# EAGLE board Display PCB v48 (EAGLE 9.7.0)
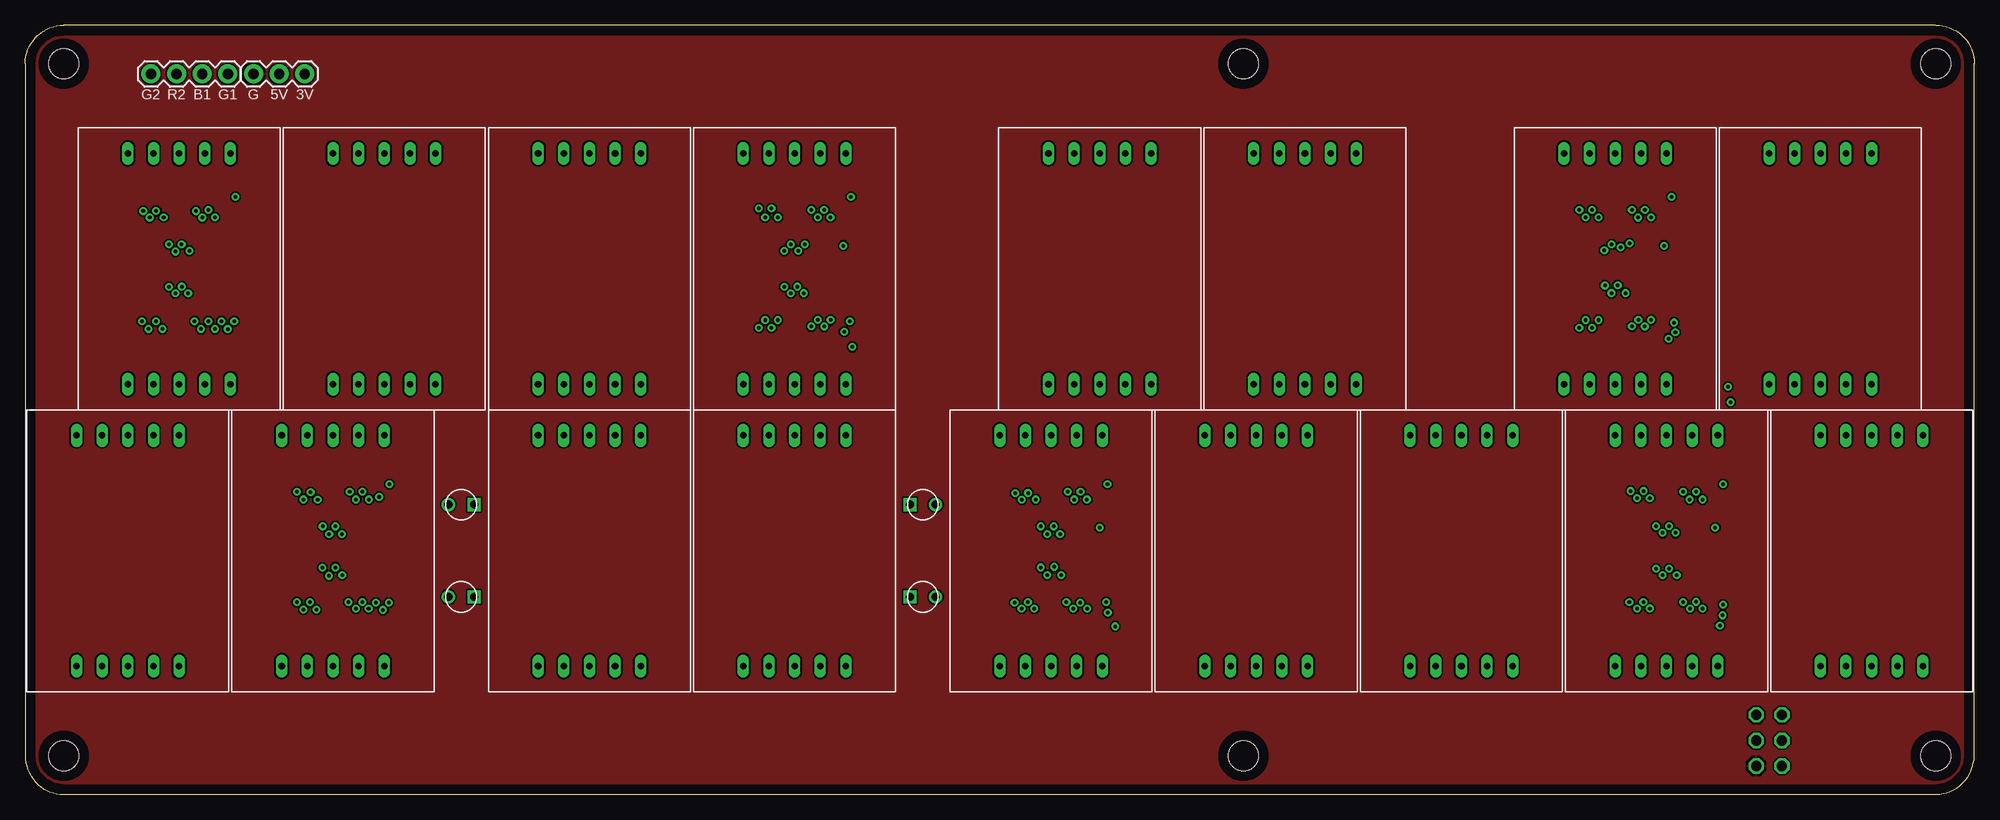
[diagram p0: board, top side]
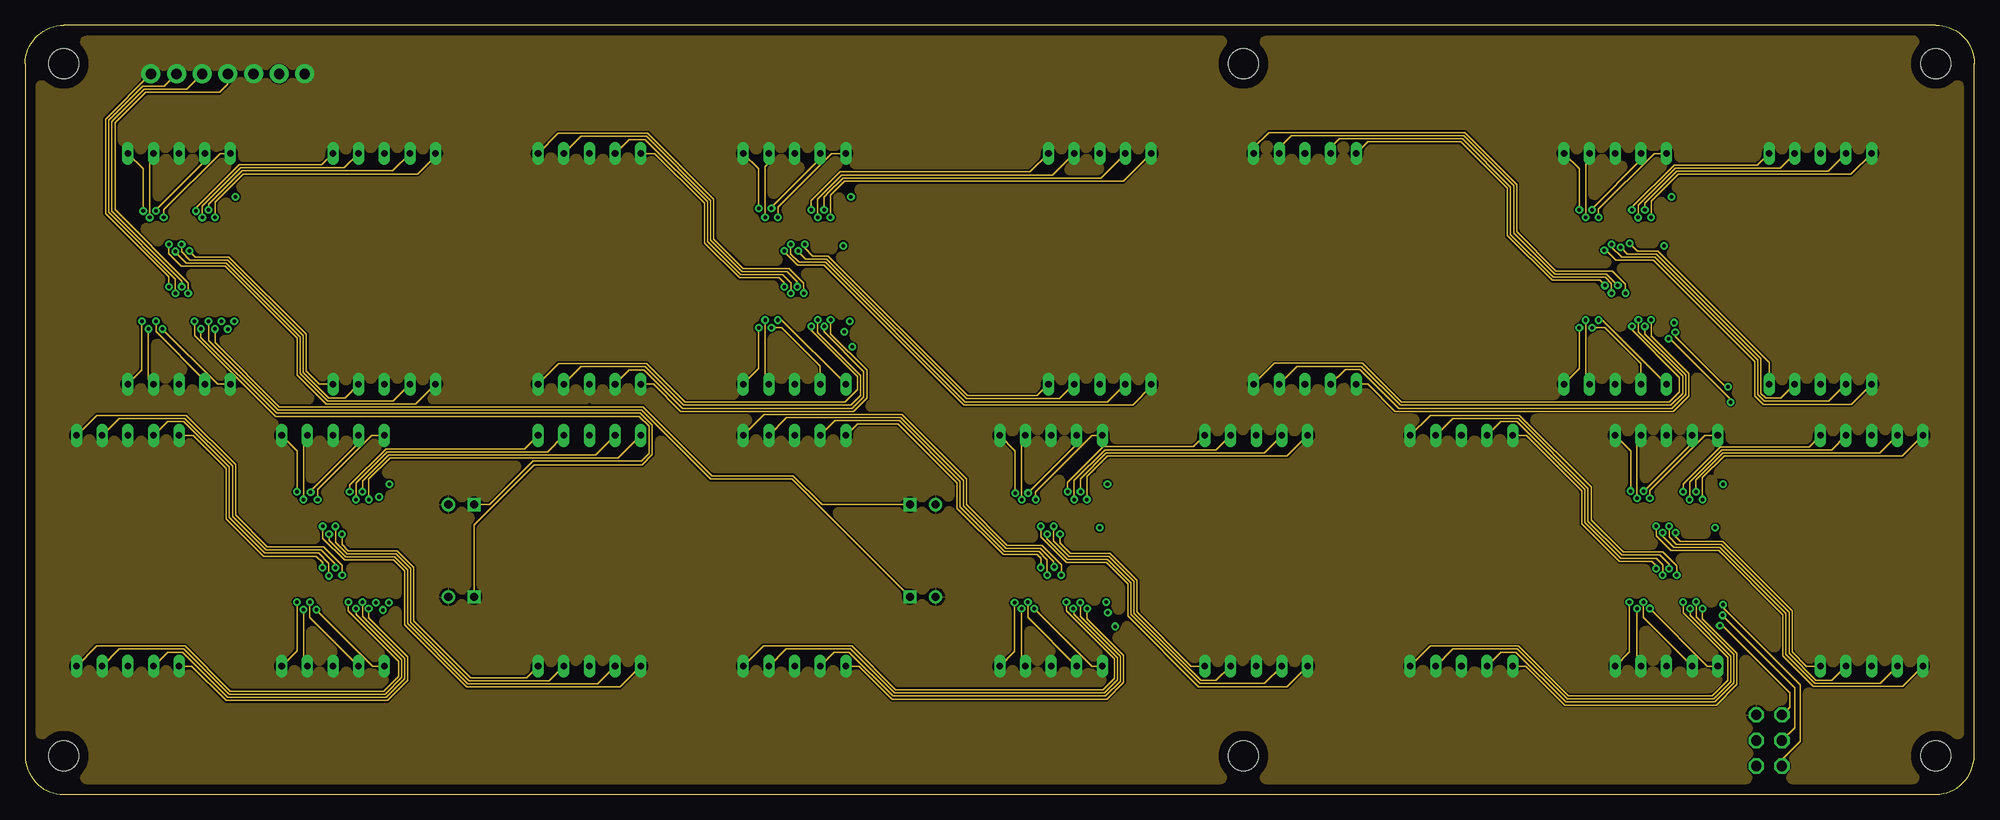
[diagram p1: board, inner layer Route2]
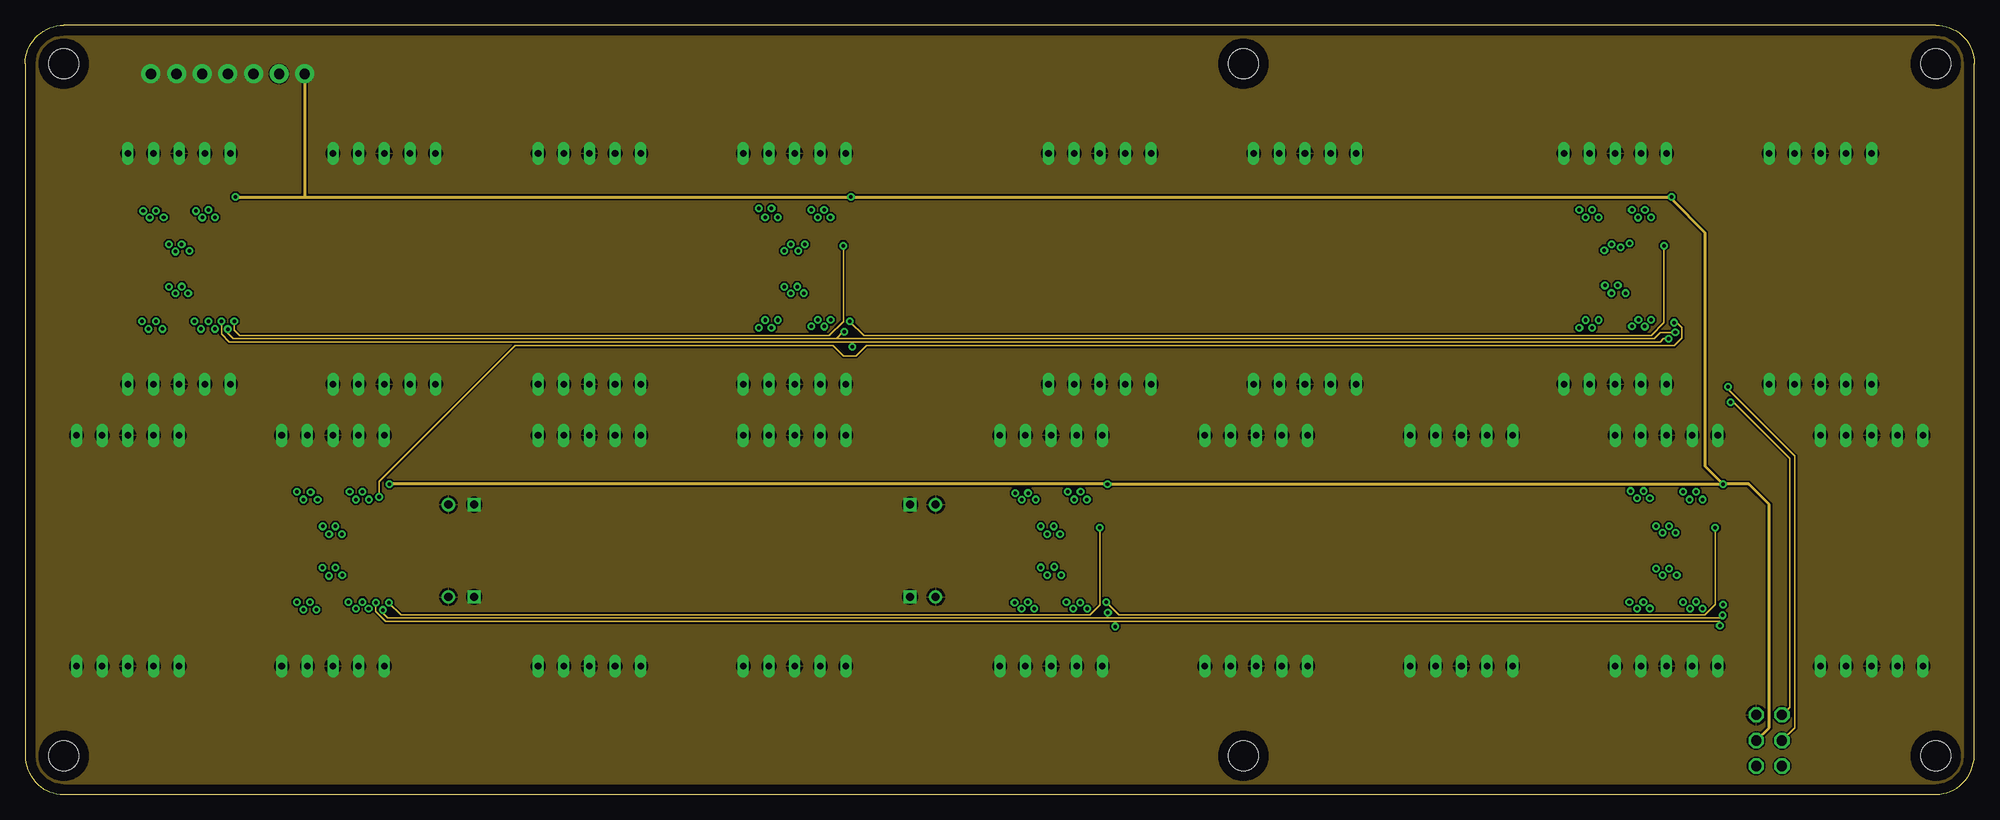
[diagram p2: board, inner layer Route15]
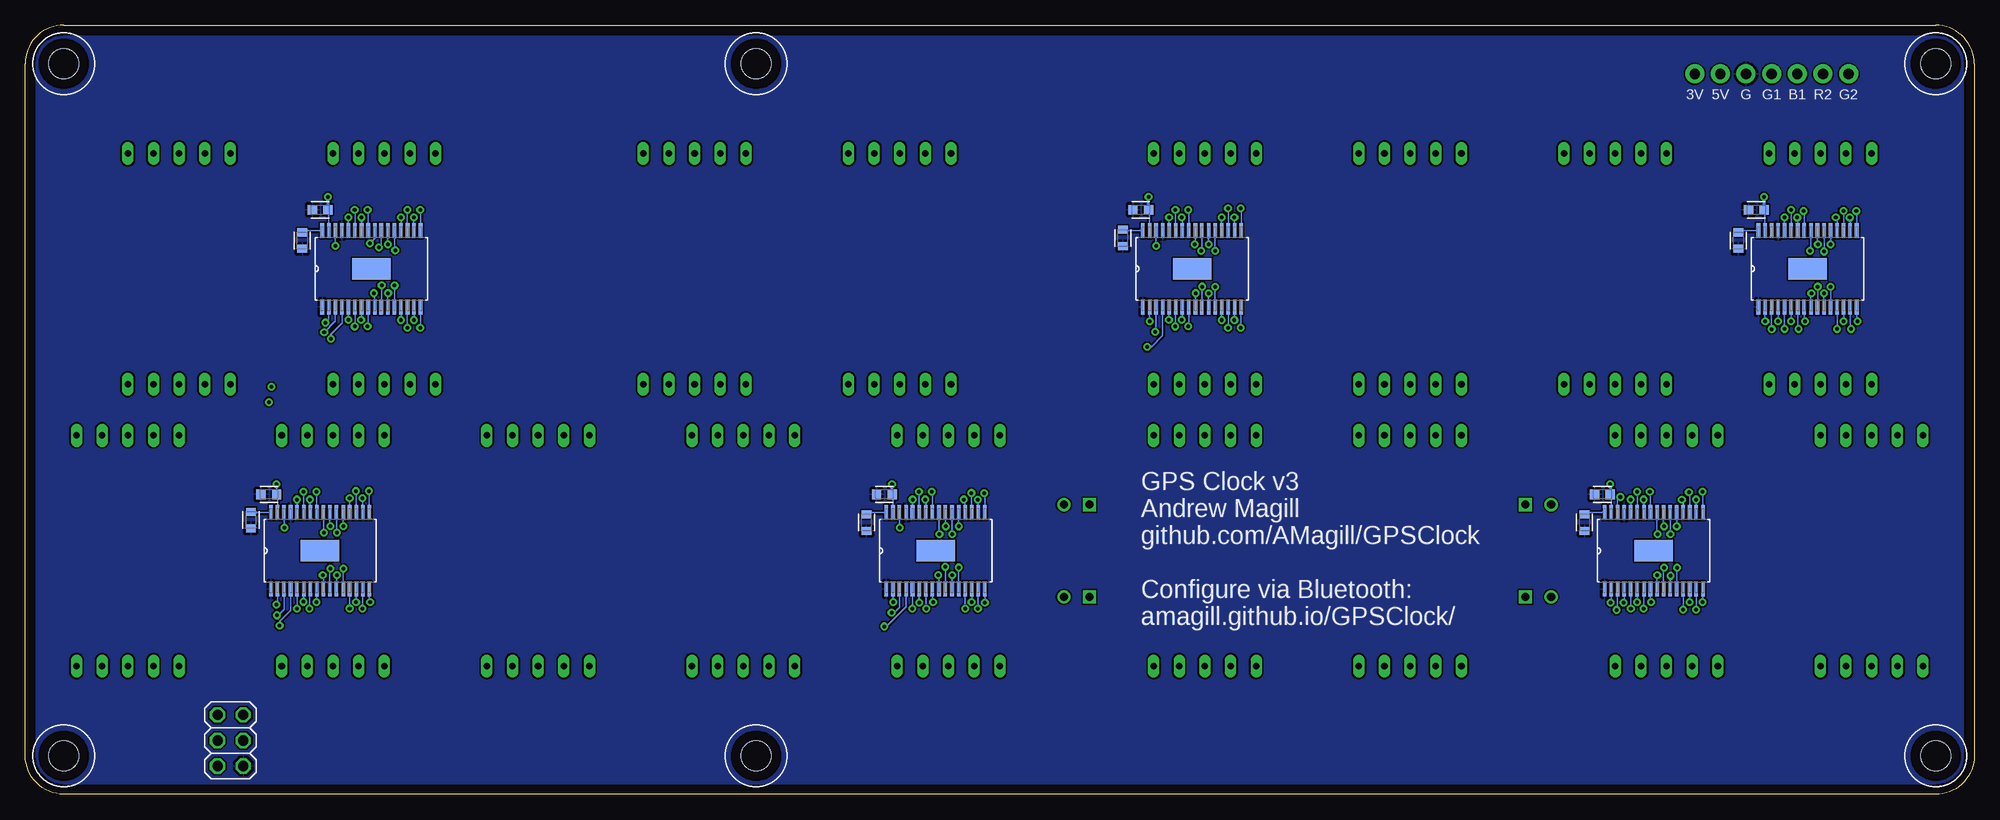
[diagram p3: board, bottom side, seen from below]

Size 193.04 x 76.2 mm. Coordinates in mm from the lower left corner, seen from the top.
Outline: 3.81,0 189.23,0 arc88 193.04,3.81 193.04,72.39 arc91 189.23,76.2 3.81,76.2 arc90 0,72.39 0,3.81 arc90 3.81,0
Copper layers (1+2*15+16): Top / Route2 / Route15 / Bottom
Stack-up 4 Layer Stack: Top SilkScreen Epoxy Ink / Top SolderMask SR:Green 0.0254mm Dk 4.3 / Top Surface Finish Lead-Free 0.02mm / Top CuFoil:007 0.035mm / Dielectric-1 Prepreg:001 0.064mm / Dielectric-2 Prepreg:001 0.064mm / Route2 CuFoil:007 0.035mm / Dielectric-3 User Defined 1.113mm / Route15 CuFoil:007 0.035mm / Dielectric-4 Prepreg:001 0.064mm / Dielectric-5 Prepreg:001 0.064mm / Bottom CuFoil:007 0.035mm / Bottom Surface Finish Lead-Free 0.02mm / Bottom SolderMask SR:Green 0.0254mm Dk 4.3 / Bottom SilkScreen Epoxy Ink
Design rules: minimum copper width 6mil, minimum drill size 0.35mm, copper clearance wire_polygon to wire_polygon 6mil, copper clearance wire_polygon to pad_smd 6mil, copper clearance wire_polygon to via 6mil, copper clearance pad_smd to pad_smd 6mil, copper clearance pad_smd to via 6mil, copper clearance via to via 6mil, copper clearance smd to pad (same net) 6mil, copper clearance smd to via (same net) 6mil, copper clearance smd to smd (same net) 6mil, dimension clearance 40mil, via restrict clearance 0mil, restrict clearance 0mil, drill distance 6mil, keepout clearance 0mil
Holes 2.95 mm at 3.81,72.39 3.81,3.81 189.23,72.39 189.23,3.81 120.65,72.39 120.65,3.81

## Footprints (pad centres in the part's own frame; a part is rotated, then mirrored left to right if it is on the bottom)
CAPC1608X85 = smd 0.921 x 0.97: 1 -0.775,0; 2 0.775,0
1X04 = drill 1.016 pad 1.88: 1 0,0; 2 2.54,0; 3 5.08,0; 4 7.62,0
1X03 = drill 1.016 pad 1.88: 1 0,0; 2 2.54,0; 3 5.08,0
2X03 = drill 1.016 octagon: 1 -2.54,-1.27; 2 -2.54,1.27; 3 0,-1.27; 4 0,1.27; 5 2.54,-1.27; 6 2.54,1.27
RESC1608X60 = smd 0.799 x 0.974: 1 -0.815,0; 2 0.815,0
SOP65P810X120-33N = smd 1.473 x 0.356: 1 -3.785,4.877; 2 -3.785,4.216; 3 -3.785,3.581; 4 -3.785,2.921; 5 -3.785,2.286; 6 -3.785,1.626; 7 -3.785,0.965; 8 -3.785,0.33; 9 -3.785,-0.33; 10 -3.785,-0.965; 11 -3.785,-1.626; 12 -3.785,-2.286; 13 -3.785,-2.921; 14 -3.785,-3.581; 15 -3.785,-4.216; 16 -3.785,-4.877; 17 3.785,-4.877; 18 3.785,-4.216; 19 3.785,-3.581; 20 3.785,-2.921; 21 3.785,-2.286; 22 3.785,-1.626; 23 3.785,-0.965; 24 3.785,-0.33; 25 3.785,0.33; 26 3.785,0.965; 27 3.785,1.626; 28 3.785,2.286; 29 3.785,2.921; 30 3.785,3.581; 31 3.785,4.216; 32 3.785,4.877 | smd 2.108 x 3.81: 33 0,0
WP424IDT = drill 0.8: AN 0,-1.27 | drill 0.8 square: CAT 0,1.27
KW1-801AVB-FOOTPRINT = drill 0.65 long: 1 -5.08,-11.43; 2 -2.54,-11.43; 3 0,-11.43; 4 2.54,-11.43; 5 5.08,-11.43; 6 5.08,11.43; 7 2.54,11.43; 8 0,11.43; 9 -2.54,11.43; 10 -5.08,11.43

## Placement (x,y rotation side)
C1  10n  [CAPC1608X85]  21.59,57.91 180 bottom
C2  10n  [CAPC1608X85]  82.55,57.91 180 bottom
C3  10n  [CAPC1608X85]  163.83,57.91 180 bottom
C4  10n  [CAPC1608X85]  36.83,29.72 180 bottom
C5  10n  [CAPC1608X85]  107.95,29.72 180 bottom
C6  10n  [CAPC1608X85]  168.91,29.72 180 bottom
J1  [1X04]  20.07,71.37 180 top
J3  455-1750-1-ND  [1X03]  22.61,71.37 0 top
JP1  PINHD-2X3  [2X03]  172.72,5.33 270 bottom
R1  2.7K  [RESC1608X60]  23.37,54.86 90 bottom
R2  2.7K  [RESC1608X60]  84.33,55.12 90 bottom
R3  2.7K  [RESC1608X60]  165.61,54.86 90 bottom
R4  2.7K  [RESC1608X60]  38.61,26.92 90 bottom
R5  2.7K  [RESC1608X60]  109.73,26.92 90 bottom
R6  2.7K  [RESC1608X60]  170.69,27.18 90 bottom
U1  TLC5952DAP  [SOP65P810X120-33N]  16.51,52.07 90 bottom
U2  TLC5952DAP  [SOP65P810X120-33N]  77.47,52.07 90 bottom
U3  TLC5952DAP  [SOP65P810X120-33N]  158.75,52.07 90 bottom
U4  TLC5952DAP  [SOP65P810X120-33N]  31.75,24.13 90 bottom
U5  TLC5952DAP  [SOP65P810X120-33N]  102.87,24.13 90 bottom
U6  TLC5952DAP  [SOP65P810X120-33N]  163.83,24.13 90 bottom
U$1  WP424IDT  [WP424IDT]  88.9,28.7 90 top
U$2  KW1-801AVB  [KW1-801AVB-FOOTPRINT]  15.24,52.07 0 top
U$3  KW1-801AVB  [KW1-801AVB-FOOTPRINT]  35.56,52.07 0 top
U$4  KW1-801AVB  [KW1-801AVB-FOOTPRINT]  55.88,52.07 0 top
U$5  KW1-801AVB  [KW1-801AVB-FOOTPRINT]  76.2,52.07 0 top
U$6  KW1-801AVB  [KW1-801AVB-FOOTPRINT]  106.43,52.07 0 top
U$7  KW1-801AVB  [KW1-801AVB-FOOTPRINT]  126.75,52.07 0 top
U$8  KW1-801AVB  [KW1-801AVB-FOOTPRINT]  157.48,52.07 0 top
U$9  KW1-801AVB  [KW1-801AVB-FOOTPRINT]  177.8,52.07 0 top
U$10  KW1-801AVB  [KW1-801AVB-FOOTPRINT]  10.16,24.13 0 top
U$11  KW1-801AVB  [KW1-801AVB-FOOTPRINT]  30.48,24.13 0 top
U$12  KW1-801AVB  [KW1-801AVB-FOOTPRINT]  55.88,24.13 0 top
U$13  KW1-801AVB  [KW1-801AVB-FOOTPRINT]  76.2,24.13 0 top
U$14  KW1-801AVB  [KW1-801AVB-FOOTPRINT]  101.6,24.13 0 top
U$15  KW1-801AVB  [KW1-801AVB-FOOTPRINT]  121.92,24.13 0 top
U$16  KW1-801AVB  [KW1-801AVB-FOOTPRINT]  142.24,24.13 0 top
U$17  KW1-801AVB  [KW1-801AVB-FOOTPRINT]  162.56,24.13 0 top
U$18  KW1-801AVB  [KW1-801AVB-FOOTPRINT]  182.88,24.13 0 top
U$19  WP424IDT  [WP424IDT]  88.9,19.56 90 top
U$20  WP424IDT  [WP424IDT]  43.18,19.56 270 top
U$21  WP424IDT  [WP424IDT]  43.18,28.7 270 top

## Library data of the parts
C1-C6 = Capacitor; CATEGORY: Capacitor; PACKAGE_SIZE: 0603; PACKAGE_TYPE: SMD; SUBCATEGORY: Ceramic Capacitors; TYPE: MLCC
J1 = SparkFun-Connectors; PROD_ID: CONN-09696
J3 = SparkFun-Connectors; PROD_ID: XXX-00000
JP1 = Connector; CATEGORY: Headers; DESCRIPTION: Header-Straight-2x3 Position; PACKAGE_TYPE: THT; PITCH: 0.100" (2.54mm); SUBCATEGORY: Headers-Male Pins; TYPE: Board to Board or Cable-Unshrouded-Through Hole-Straight
R1-R6 = Resistor; CATEGORY: Resistors; DESCRIPTION: Chip Resistor 1.60 X 0.82 X 0.60 mm body 0603(1608-METRIC) Package; PACKAGE_SIZE: 0603; PACKAGE_TYPE: SMD
U1-U6 = SnapEDA Library; MPN: TLC5952DAP; OC_FARNELL: 1755260; OC_NEWARK: 24R9993; PACKAGE: HTSSOP-32; SUPPLIER: Texas Instruments
U$1-U$21 = GPS Clock Components

## Nets
3VCC: C1.1 C2.1 C3.1 C4.1 C5.1 C6.1 J3.3 JP1.4 U1.31 U2.31 U3.31 U4.31 U5.31 U6.31
5VCC: J3.2 JP1.2 U$1.AN U$2.3 U$2.8 U$3.3 U$3.8 U$4.3 U$4.8 U$5.3 U$5.8 U$6.3 U$6.8 U$7.3 U$7.8 U$8.3 U$8.8 U$9.3 U$9.8 U$10.3 U$10.8 U$11.3 U$11.8 U$12.3 U$12.8 U$13.3 U$13.8 U$14.3 U$14.8 U$15.3 U$15.8 U$16.3 U$16.8 U$17.3 U$17.8 U$18.3 U$18.8 U$19.AN U$20.AN U$21.AN
B1 [segments]: J1.2 U1.10
CLK: JP1.3 U1.3 U2.3 U3.3 U4.3 U5.3 U6.3
G1 [segments]: J1.1 U1.9
G2 [segments]: J1.4 U1.12
GND: C1.2 C2.2 C3.2 C4.2 C5.2 C6.2 J3.1 JP1.6 R1.1 R2.1 R3.1 R4.1 R5.1 R6.1 U1.1 U1.29 U2.1 U2.29 U3.1 U3.29 U4.1 U4.29 U5.1 U5.29 U6.1 U6.29
LATCH: JP1.1 U1.4 U2.4 U3.4 U4.4 U5.4 U6.4
N$1 [segments]: U2.10 U$4.9
N$2 [segments]: U2.11 U$4.7
N$3 [segments]: U2.12 U$4.6
N$4 [segments]: U2.13 U$5.5
N$5 [segments]: U2.14 U$5.4
N$6: R1.2 U1.32
N$7 [segments]: U1.20 U$2.6
N$8 [segments]: U1.19 U$2.7
N$9 [segments]: U1.18 U$2.9
N$10 [segments]: U1.17 U$2.10
N$11 [segments]: U1.16 U$2.1
N$12 [segments]: U1.15 U$2.2
N$13 [segments]: U1.14 U$2.4
N$14 [segments]: U1.13 U$2.5
N$15 [segments]: U4.13 U$11.5
N$16 [segments]: U2.15 U$5.2
N$17 [segments]: U1.21 U$3.5
N$18 [segments]: U1.22 U$3.4
N$19 [segments]: U1.23 U$3.2
N$20 [segments]: U1.24 U$3.1
N$21 [segments]: U1.25 U$3.10
N$22 [segments]: U1.26 U$3.9
N$23 [segments]: U1.27 U$3.7
N$24 [segments]: U1.28 U$3.6
N$25 [segments]: U2.16 U$5.1
N$26 [segments]: U2.17 U$5.10
N$27 [segments]: U2.18 U$5.9
N$28 [segments]: U2.19 U$5.7
N$29 [segments]: U2.20 U$5.6
N$30 [segments]: U4.10 U$10.9
N$31 [segments]: U2.21 U$6.5
N$32 [segments]: U2.22 U$6.4
N$33 [segments]: U2.23 U$6.2
N$34 [segments]: U2.24 U$6.1
N$35 [segments]: U2.25 U$6.10
N$36 [segments]: U2.26 U$6.9
N$37 [segments]: U2.27 U$6.7
N$38 [segments]: U2.28 U$6.6
N$39 [segments]: U2.5 U$4.5
N$40 [segments]: U2.6 U$4.4
N$41 [segments]: U2.7 U$4.2
N$42 [segments]: U2.8 U$4.1
N$43 [segments]: U2.9 U$4.10
N$44 [segments]: U3.10 U$7.9
N$45 [segments]: U3.11 U$7.7
N$46 [segments]: U3.12 U$7.6
N$47 [segments]: U4.11 U$10.7
N$48 [segments]: U4.12 U$10.6
N$49 [segments]: U4.21 U$12.5
N$50 [segments]: U4.22 U$12.4
N$51 [segments]: U4.23 U$12.2
N$52 [segments]: U4.24 U$12.1
N$53 [segments]: U4.25 U$12.10
N$54 [segments]: U4.26 U$12.9
N$55 [segments]: U3.21 U$9.5
N$56 [segments]: U3.22 U$9.4
N$57 [segments]: U3.23 U$9.2
N$58 [segments]: U3.24 U$9.1
N$59 [segments]: U3.25 U$9.10
N$60 [segments]: U3.26 U$9.9
N$61 [segments]: U3.27 U$9.7
N$62 [segments]: U3.28 U$9.6
N$63 [segments]: U3.5 U$7.5
N$64 [segments]: U3.6 U$7.4
N$65 [segments]: U3.7 U$7.2
N$66 [segments]: U3.8 U$7.1
N$67 [segments]: U3.9 U$7.10
N$68 [segments]: U4.27 U$12.7
N$69 [segments]: U4.28 U$12.6
N$70 [segments]: U4.5 U$10.5
N$71 [segments]: U4.6 U$10.4
N$72 [segments]: U4.7 U$10.2
N$73 [segments]: U4.8 U$10.1
N$74 [segments]: U4.9 U$10.10
N$75 [segments]: U4.14 U$11.4
N$76 [segments]: U4.15 U$11.2
N$77 [segments]: U4.16 U$11.1
N$78 [segments]: U3.13 U$8.5
N$79 [segments]: U4.17 U$11.10
N$80 [segments]: U4.18 U$11.9
N$81 [segments]: U4.19 U$11.7
N$82 [segments]: U4.20 U$11.6
N$83 [segments]: U5.13 U$14.5
N$84 [segments]: U5.10 U$13.9
N$85 [segments]: U5.11 U$13.7
N$86 [segments]: U5.12 U$13.6
N$87 [segments]: U5.21 U$15.5
N$88 [segments]: U5.22 U$15.4
N$89 [segments]: U5.23 U$15.2
N$90 [segments]: U5.24 U$15.1
N$91 [segments]: U5.25 U$15.10
N$92 [segments]: U5.26 U$15.9
N$93 [segments]: U5.27 U$15.7
N$94 [segments]: U5.28 U$15.6
N$95 [segments]: U3.14 U$8.4
N$96 [segments]: U3.15 U$8.2
N$97 [segments]: U3.16 U$8.1
N$98 [segments]: U3.17 U$8.10
N$99 [segments]: U3.18 U$8.9
N$100 [segments]: U3.19 U$8.7
N$101 [segments]: U3.20 U$8.6
N$102 [segments]: U5.5 U$13.5
N$103 [segments]: U5.6 U$13.4
N$104 [segments]: U5.7 U$13.2
N$105 [segments]: U5.8 U$13.1
N$106 [segments]: U5.9 U$13.10
N$107 [segments]: U5.14 U$14.4
N$108 [segments]: U5.15 U$14.2
N$109 [segments]: U5.16 U$14.1
N$110 [segments]: U5.17 U$14.10
N$111 [segments]: U5.18 U$14.9
N$112 [segments]: U5.19 U$14.7
N$114: U5.2 U6.30
N$115: U4.2 U5.30
N$116: U3.2 U4.30
N$117: U2.2 U3.30
N$118: U1.2 U2.30
N$119 [segments]: U5.20 U$14.6
N$121: R4.2 U4.32
N$122: R3.2 U3.32
N$123: R2.2 U2.32
N$124 [segments]: U6.13 U$17.5
N$125: R5.2 U5.32
N$126 [segments]: U6.14 U$17.4
N$127 [segments]: U6.10 U$16.9
N$128 [segments]: U6.11 U$16.7
N$129 [segments]: U6.12 U$16.6
N$130 [segments]: U6.21 U$18.5
N$131 [segments]: U6.22 U$18.4
N$132 [segments]: U6.23 U$18.2
N$133 [segments]: U6.24 U$18.1
N$134 [segments]: U6.25 U$18.10
N$135 [segments]: U6.26 U$18.9
N$136 [segments]: U6.27 U$18.7
N$137 [segments]: U6.28 U$18.6
N$138 [segments]: U6.5 U$16.5
N$139: R6.2 U6.32
N$140 [segments]: U6.15 U$17.2
N$141 [segments]: U6.6 U$16.4
N$142 [segments]: U6.7 U$16.2
N$143 [segments]: U6.8 U$16.1
N$144 [segments]: U6.9 U$16.10
N$145 [segments]: U6.16 U$17.1
N$146 [segments]: U6.17 U$17.10
N$147 [segments]: U6.18 U$17.9
N$148 [segments]: U6.19 U$17.7
N$149 [segments]: U6.20 U$17.6
N$155 [segments]: U1.6 U$19.CAT
N$157 [segments]: U1.8 U$21.CAT
N$158 [segments]: U1.5 U$1.CAT
N$159 [segments]: U1.7 U$20.CAT
R2 [segments]: J1.3 U1.11
SIN: JP1.5 U6.2

## Tracks (layer width: path | path; a pad name or v marks a point on that pad's centre or on a via)
3VCC  (via drill 0.35)
  Route15 0.305: v20.83,59.18 27.69,59.18 | 27.69,59.18 v81.79,59.18 v163.07,59.18 163.07,58.95 166.37,55.65 166.37,32.51 v168.15,30.73 | v36.07,30.73 v107.19,30.73 v168.15,30.73 | JP1.4 172.72,6.6 172.72,28.7 170.69,30.73 v168.15,30.73 | J3.3 27.69,59.18
  Bottom 0.152: U1.31 20.73,57.82 C1.1 | C3.1 162.97,57.82 U3.31 | U2.31 81.69,57.82 C2.1 | U4.31 35.97,29.63 C4.1 | U5.31 107.09,29.63 C5.1 | v168.15,30.73 168.15,29.73 C6.1 168.05,29.63 U6.31
  Bottom 0.305: C1.1 20.82,59.17 v20.83,59.18 | v163.07,59.18 163.07,57.92 C3.1 | C2.1 81.78,59.17 v81.79,59.18 | C5.1 107.17,30.72 v107.19,30.73 | C4.1 36.05,30.69 36.08,30.72 v36.07,30.73 | 168.13,30.72 v168.15,30.73
5VCC
  pour Route2: 201.93,81.28 -5.84,81.28 -5.84,-9.91 201.93,-9.91 201.68,-9.91
  pour Route15: -9.14,84.07 -9.14,-13.21 207.01,-13.21 207.01,84.33 205.23,84.33
B1  (via drill 0.35)
  Route2 0.152: J1.2 16,69.85 11.78,69.85 8.59,66.65 8.59,57.79 15.5,50.87 v15.5,50.3
  Bottom 0.152: U1.10 15.5,48.33 v15.5,50.3
CLK  (via drill 0.35)
  Route2 0.152: 168.15,17.68 v168.1,17.73 175.26,10.57 175.26,6.6 JP1.3 | v168.66,40.39 168.4,40.39 163.43,45.35 v163.43,45.77
  Route15 0.152: v107.24,17.99 107.19,17.94 107.19,17.48 | 107.19,17.48 167.84,17.48 v168.1,17.73 | 80.34,45.16 81.01,45.83 v81.11,45.83 | 80.34,45.16 20.61,45.16 20.06,45.71 v20.06,46.09 | 80.34,45.16 161.36,45.16 161.95,45.76 163.42,45.76 v163.43,45.77 | v35.44,18.27 35.44,17.92 35.88,17.48 107.19,17.48 | JP1.3 175.26,6.6 175.26,33.53 168.66,40.13 v168.66,40.39
  Bottom 0.152: U6.3 167.41,18.33 167.96,17.78 168.05,17.78 v168.1,17.73 | v107.24,17.99 106.98,17.99 106.45,18.52 U5.3 | U3.3 162.33,46.87 v163.43,45.77 | U2.3 81.05,45.88 v81.11,45.83 | U1.3 20.09,46.13 v20.06,46.09 | v35.44,18.27 35.44,18.31 35.33,18.42 U4.3
G1  (via drill 0.35)
  Route2 0.152: J1.1 20.07,70.36 19.25,69.55 11.91,69.55 8.89,66.53 8.89,57.91 16.14,50.66 v16.14,49.65
  Bottom 0.152: U1.9 16.18,49.61 v16.14,49.65
G2  (via drill 0.35)
  Route2 0.152: J1.4 7.98,66.9 7.98,57.53 14.22,51.28 v14.22,50.29
  Bottom 0.152: U1.12 v14.22,50.29
GND
  pour Bottom: -3.81,78.49 -3.81,-6.1 199.39,-6.1 199.39,78.49
  pour Top: -1.27,77.22 -1.27,-3.81 196.85,-3.81 196.85,77.22
LATCH  (via drill 0.35)
  Route2 0.152: v167.85,16.72 168.1,16.72 174.75,10.06 174.75,8.64 JP1.1 | v168.91,38.86 168.91,39.12 162.88,45.15 v162.76,45.15
  Route15 0.152: 81.92,44.83 v81.92,44.32 | v107.95,16.64 107.95,17.12 | 81.92,44.83 20.21,44.83 19.44,45.6 v19.44,46.87 | v167.85,16.72 167.85,17.12 107.95,17.12 | 81.92,44.83 161.94,44.83 162.26,45.15 v162.76,45.15 | v34.72,18.97 34.72,18.11 35.71,17.12 107.95,17.12 | JP1.1 174.75,8.64 174.75,33.27 169.16,38.86 v168.91,38.86
  Bottom 0.152: U2.4 80.39,45.43 81.5,44.32 v81.92,44.32 | U6.4 166.74,20.33 166.74,18.24 167.85,17.13 v167.85,16.72 | U4.4 34.67,18.97 v34.72,18.97 | U1.4 v19.43,46.88 v19.44,46.87 | v162.76,45.15 162.76,45.58 161.67,46.67 U3.4 | U5.4 105.79,18.57 107.73,16.64 v107.95,16.64
N$1  (via drill 0.35)
  Route2 0.152: U$4.9 55.03,65.19 61.53,65.19 67.89,58.83 67.89,54.89 70.99,51.79 75.46,51.79 76.46,50.79 v76.46,50.3
  Bottom 0.152: U2.10 76.5,50.11 76.46,50.16 v76.46,50.3
N$2  (via drill 0.35)
  Route2 0.152: U$4.7 59.81,64.89 61.4,64.89 67.59,58.7 67.59,54.76 70.87,51.49 75.01,51.49 75.83,50.66 v75.83,49.65
  Bottom 0.152: U2.11 75.84,49.63 v75.83,49.65
N$3  (via drill 0.35)
  Route2 0.152: U$4.6 62.36,63.5 67.28,58.57 67.28,54.64 70.74,51.18 74.68,51.18 75.18,50.67 v75.18,50.29
  Bottom 0.152: U2.12 v75.18,50.29
N$4  (via drill 0.35)
  Route2 0.152: U$5.5 74.93,46.99 v74.55,46.99
  Bottom 0.152: U2.13 v74.55,46.99
N$5  (via drill 0.35)
  Route2 0.152: U$5.4 78.74,42.42 74.93,46.23 v73.91,46.23
  Bottom 0.152: U2.14 73.89,46.25 v73.91,46.23
N$6
  Bottom 0.152: R1.2 23.19,55.85 U1.32
N$7  (via drill 0.35)
  Route2 0.152: v13.72,57.15 13.72,57.91 19.3,63.5 U$2.6
  Bottom 0.152: U1.20 13.59,57.02 v13.72,57.15
N$8  (via drill 0.35)
  Route2 0.152: v12.96,57.79 12.96,57.92 17.78,62.74 U$2.7
  Bottom 0.152: U1.19 12.93,56.89 12.93,57.76 v12.96,57.79
N$9  (via drill 0.35)
  Route2 0.152: v12.33,57.14 12.33,62.62 12.7,62.99 U$2.9
  Bottom 0.152: U1.18 12.29,57.11 v12.33,57.14
N$10  (via drill 0.35)
  Route2 0.152: v11.68,57.78 11.68,61.98 U$2.10
  Bottom 0.152: U1.17 11.63,57.73 v11.68,57.78
N$11  (via drill 0.35)
  Route2 0.152: v11.56,46.86 11.56,42.04 U$2.1
  Bottom 0.152: U1.16 11.63,46.94 v11.56,46.86
N$12  (via drill 0.35)
  Route2 0.152: v12.19,46.1 12.19,41.15 U$2.2
  Bottom 0.152: U1.15 12.29,46.2 v12.19,46.1
N$13  (via drill 0.35)
  Route2 0.152: v12.95,46.86 12.95,45.85 17.78,41.02 U$2.4
  Bottom 0.152: U1.14 12.93,46.89 v12.95,46.86
N$14  (via drill 0.35)
  Route2 0.152: v13.59,46.1 19.05,40.64 U$2.5
  Bottom 0.152: U1.13 v13.59,46.1
N$15  (via drill 0.35)
  Route2 0.152: v28.83,18.29 34.42,12.7 U$11.5
  Bottom 0.152: U4.13 v28.83,18.29
N$16  (via drill 0.35)
  Route2 0.152: U$5.2 73.28,41.02 v73.28,46.99
  Bottom 0.152: U2.15 73.25,47.02 v73.28,46.99
N$17  (via drill 0.35)
  Route2 0.152: v14.22,54.48 14.22,53.58 15.47,52.34 19.79,52.34 26.92,45.2 26.92,41.56 29.81,38.67 38.67,38.67 U$3.5
  Bottom 0.152: U1.21 v14.22,54.48
N$18  (via drill 0.35)
  Route2 0.152: v14.89,53.78 14.89,53.67 15.92,52.64 19.92,52.64 27.23,45.33 27.23,41.68 29.93,38.98 36.44,38.98 U$3.4
  Bottom 0.152: U1.22 14.86,55.83 14.86,53.98 14.89,53.95 v14.89,53.78
N$19  (via drill 0.35)
  Route2 0.152: v15.49,54.48 15.49,53.75 16.3,52.95 20.04,52.95 27.53,45.46 27.53,41.81 30.06,39.28 31.66,39.28 U$3.2
  Bottom 0.152: U1.23 15.54,54.53 v15.49,54.48
N$20  (via drill 0.35)
  Route2 0.152: U$3.1 29.13,40.64 27.84,41.94 27.84,45.58 20.17,53.25 16.85,53.25 v16.26,53.85
  Bottom 0.152: U1.24 16.18,53.92 v16.26,53.85
N$21  (via drill 0.35)
  Route2 0.152: U$3.10 29.36,62.38 21.21,62.38 16.89,58.06 v16.89,57.78
  Bottom 0.152: U1.25 16.84,57.73 v16.89,57.78
N$22  (via drill 0.35)
  Route2 0.152: U$3.9 31.6,62.08 21.34,62.08 17.53,58.27 v17.53,57.14
  Bottom 0.152: U1.26 17.48,57.08 v17.53,57.14
N$23  (via drill 0.35)
  Route2 0.152: U$3.7 36.37,61.77 21.46,61.77 18.16,58.47 v18.16,57.91
  Bottom 0.152: U1.27 18.14,56.89 18.14,57.89 v18.16,57.91
N$24  (via drill 0.35)
  Route2 0.152: U$3.6 40.64,63.25 38.86,61.47 21.59,61.47 18.8,58.67 v18.8,57.15
  Bottom 0.152: U1.28 v18.8,57.15
N$25  (via drill 0.35)
  Route2 0.152: U$5.1 72.64,42.16 v72.64,46.23
  Bottom 0.152: U2.16 72.64,48.23 v72.64,46.23
N$26  (via drill 0.35)
  Route2 0.152: U$5.10 72.64,61.98 v72.64,58.04
  Bottom 0.152: U2.17 72.59,57.99 v72.64,58.04
N$27  (via drill 0.35)
  Route2 0.152: U$5.9 73.66,62.61 73.25,62.2 73.25,57.17 v73.28,57.15
  Bottom 0.152: U2.18 73.25,57.12 v73.28,57.15
N$28  (via drill 0.35)
  Route2 0.152: U$5.7 78.74,62.99 73.91,58.17 v73.91,58.04
  Bottom 0.152: U2.19 73.89,58.01 v73.91,58.04
N$29  (via drill 0.35)
  Route2 0.152: U$5.6 79.88,63.5 74.55,58.17 v74.55,57.15
  Bottom 0.152: U2.20 v74.55,57.15
N$30  (via drill 0.35)
  Route2 0.152: U$10.9 9.31,37.25 15.81,37.25 20.52,32.54 20.52,27.55 23.86,24.21 29.3,24.21 30.73,22.79 v30.73,22.48 v30.73,22.47
  Bottom 0.152: v30.73,22.47 30.79,22.42 U4.10
N$31  (via drill 0.35)
  Route2 0.152: U$6.5 111.51,40.39 109.7,38.58 92.97,38.58 79.13,52.43 76.51,52.43 75.18,53.76 v75.18,53.84
  Bottom 0.152: U2.21 v75.18,53.85 v75.18,53.84
N$32  (via drill 0.35)
  Route2 0.152: U$6.4 107.21,38.89 93.1,38.89 79.25,52.73 76.63,52.73 75.82,53.54 v75.82,54.48
  Bottom 0.152: U2.22 75.84,54.51 v75.82,54.48
N$33  (via drill 0.35)
  Route2 0.152: U$6.2 102.44,39.19 93.22,39.19 79.38,53.03 77.27,53.03 76.57,53.73 v76.57,53.84
  Bottom 0.152: U2.23 76.5,53.92 76.57,53.86 v76.57,53.84
N$34  (via drill 0.35)
  Route2 0.152: U$6.1 100.2,39.5 93.35,39.5 79.51,53.34 77.98,53.34 77.22,54.1 v77.22,54.48
  Bottom 0.152: U2.24 77.14,54.56 v77.22,54.48
N$35  (via drill 0.35)
  Route2 0.152: U$6.10 99.52,61.67 80.72,61.67 77.85,58.8 v77.85,57.91
  Bottom 0.152: U2.25 77.8,57.86 v77.85,57.91
N$36  (via drill 0.35)
  Route2 0.152: U$6.9 101.75,61.37 80.87,61.37 78.49,58.98 v78.49,57.15
  Bottom 0.152: U2.26 78.44,57.1 v78.49,57.15
N$37  (via drill 0.35)
  Route2 0.152: U$6.7 106.53,61.06 81,61.06 79.44,59.5 79.35,59.41 79.12,59.18 v79.12,57.91
  Bottom 0.152: U2.27 79.1,57.89 v79.12,57.91
N$38  (via drill 0.35)
  Route2 0.152: U$6.6 108.76,60.76 81.13,60.76 79.76,59.39 v79.76,57.15
  Bottom 0.152: U2.28 v79.76,57.15
N$39  (via drill 0.35)
  Route2 0.152: U$4.5 62.23,40.64 64.93,37.94 82.04,37.94 83.36,39.26 83.36,42.02 79.83,45.55 79.76,45.62 v79.76,47
  Bottom 0.152: U2.5 v79.76,47.01 v79.76,47
N$40  (via drill 0.35)
  Route2 0.152: U$4.4 59.82,42.04 61.29,42.04 65.08,38.24 81.91,38.24 83.05,39.38 83.05,41.9 79.1,45.85 79.1,46.31 v79.13,46.35
  Bottom 0.152: U2.6 79.1,47.25 79.1,46.38 v79.13,46.35
N$41  (via drill 0.35)
  Route2 0.152: U$4.2 55.07,42.37 61.39,42.37 65.21,38.55 81.79,38.55 82.75,39.51 82.75,41.52 78.49,45.77 v78.49,47
  Bottom 0.152: U2.7 78.44,47.06 v78.49,47
N$42  (via drill 0.35)
  Route2 0.152: U$4.1 52.83,42.67 61.52,42.67 65.34,38.85 81.21,38.85 82.44,40.08 82.44,41.39 77.85,45.98 v77.85,46.35
  Bottom 0.152: U2.8 77.8,46.41 v77.85,46.35
N$43  (via drill 0.35)
  Route2 0.152: U$4.10 52.8,65.5 61.65,65.5 68.2,58.95 68.2,55.02 71.12,52.09 75.67,52.09 77.11,50.65 v77.11,49.66
  Bottom 0.152: U2.9 77.14,49.48 77.11,49.51 v77.11,49.66
N$44  (via drill 0.35)
  Route2 0.152: U$7.9 124.21,64.05 125.41,65.25 142.47,65.25 147.42,60.3 147.42,55.6 151.49,51.54 156.62,51.54 v157.73,50.42
  Bottom 0.152: U3.10 157.73,48.34 v157.73,50.42
N$45  (via drill 0.35)
  Route2 0.152: U$7.7 129.29,64.05 130.18,64.95 142.34,64.95 147.12,60.17 147.12,55.48 151.36,51.23 156.49,51.23 157.1,50.62 v157.1,49.66
  Bottom 0.152: U3.11 157.12,49.63 v157.1,49.66
N$46  (via drill 0.35)
  Route2 0.152: U$7.6 132.97,64.64 142.22,64.64 146.81,60.05 146.81,55.35 151.23,50.93 155.94,50.93 v156.45,50.41
  Bottom 0.152: U3.12 156.46,50.4 v156.45,50.41
N$47  (via drill 0.35)
  Route2 0.152: U$10.7 14.09,36.95 15.68,36.95 20.22,32.41 20.22,27.42 23.73,23.91 29.04,23.91 30.05,22.9 30.05,21.66 v30.07,21.64
  Bottom 0.152: U4.11 30.12,21.57 30.07,21.63 v30.07,21.64
N$48  (via drill 0.35)
  Route2 0.152: U$10.6 16.64,35.56 19.91,32.28 19.91,27.3 23.62,23.58 28.83,23.58 29.45,22.97 v29.45,22.46
  Bottom 0.152: v29.45,22.46 29.46,22.45 U4.12
N$49  (via drill 0.35)
  Route2 0.152: U$12.5 58.9,10.64 43.71,10.64 37.57,16.79 37.57,22.12 36.47,23.22 31.62,23.22 29.46,25.38 v29.46,26.54
  Bottom 0.152: U4.21 v29.46,26.54
N$50  (via drill 0.35)
  Route2 0.152: U$12.4 56.67,10.95 43.84,10.95 37.87,16.92 37.87,22.25 36.6,23.52 31.75,23.52 30.1,25.17 v30.1,25.78
  Bottom 0.152: U4.22 30.12,25.81 v30.1,25.78
N$51  (via drill 0.35)
  Route2 0.152: U$12.2 51.89,11.25 43.97,11.25 38.18,17.04 38.18,22.38 36.73,23.82 31.88,23.82 30.73,24.97 v30.73,26.54
  Bottom 0.152: U4.23 30.79,26.59 v30.73,26.54
N$52  (via drill 0.35)
  Route2 0.152: U$12.1 49.66,11.56 44.09,11.56 38.48,17.17 38.48,22.5 36.85,24.13 32,24.13 31.37,24.77 v31.37,25.78
  Bottom 0.152: U4.24 31.42,25.83 v31.37,25.78
N$53  (via drill 0.35)
  Route2 0.152: U$12.10 49.48,34.24 35.74,34.24 32.13,30.63 v32.13,29.97
  Bottom 0.152: U4.25 32.08,29.92 v32.13,29.97
N$54  (via drill 0.35)
  Route2 0.152: U$12.9 51.71,33.93 35.87,33.93 32.77,30.83 v32.77,29.21
  Bottom 0.152: U4.26 32.72,29.16 v32.77,29.21
N$55  (via drill 0.35)
  Route2 0.152: U$9.5 180.88,38.64 172.13,38.64 171.3,39.47 171.3,42.86 161.25,52.91 157.53,52.91 156.53,53.91 v156.4,53.91
  Bottom 0.152: U3.21 156.46,53.98 v156.4,53.91
N$56  (via drill 0.35)
  Route2 0.152: U$9.4 178.65,38.95 172.26,38.95 171.61,39.6 171.61,43.01 161.4,53.22 158.11,53.22 157.11,54.22 v157.11,54.49
  Bottom 0.152: U3.22 157.12,54.51 v157.11,54.49
N$57  (via drill 0.35)
  Route2 0.152: U$9.2 173.87,39.25 172.38,39.25 171.91,39.73 171.91,43.18 161.57,53.52 158.69,53.52 v158.01,54.2
  Bottom 0.152: U3.23 157.78,54.42 v158.01,54.2
N$58  (via drill 0.35)
  Route2 0.152: U$9.1 172.72,42.8 161.69,53.83 159.67,53.83 v158.91,54.59
  Bottom 0.152: v158.91,54.59 158.42,55.08 U3.24
N$59  (via drill 0.35)
  Route2 0.152: U$9.10 171.58,62.36 163.33,62.36 159.13,58.16 v159.13,57.91
  Bottom 0.152: U3.25 159.08,57.86 v159.13,57.91
N$60  (via drill 0.35)
  Route2 0.152: U$9.9 173.81,62.05 163.46,62.05 159.76,58.35 v159.76,57.14
  Bottom 0.152: U3.26 159.72,57.1 v159.76,57.14
N$61  (via drill 0.35)
  Route2 0.152: U$9.7 178.59,61.75 163.58,61.75 160.41,58.58 v160.41,57.9
  Bottom 0.152: v160.41,57.9 160.38,57.86 U3.27
N$62  (via drill 0.35)
  Route2 0.152: U$9.6 180.82,61.44 163.71,61.44 161.04,58.77 v161.04,57.15
  Bottom 0.152: U3.28 v161.04,57.15
N$63  (via drill 0.35)
  Route2 0.152: U$7.5 132.97,40.64 135.67,37.94 163.24,37.94 164.76,39.47 164.76,41.69 161.04,45.41 v161.04,47
  Bottom 0.152: U3.5 v161.04,47.01 v161.04,47
N$64  (via drill 0.35)
  Route2 0.152: U$7.4 130.75,42.1 132.21,42.1 136.07,38.24 163.11,38.24 164.46,39.59 164.46,41.56 160.41,45.61 v160.41,46.35
  Bottom 0.152: U3.6 160.38,47.25 160.38,46.38 v160.41,46.35
N$65  (via drill 0.35)
  Route2 0.152: U$7.2 125.97,42.41 132.34,42.41 136.2,38.55 162.98,38.55 164.16,39.72 164.16,41.43 159.77,45.82 v159.77,47
  Bottom 0.152: U3.7 159.72,47.06 v159.77,47
N$66  (via drill 0.35)
  Route2 0.152: U$7.1 123.74,42.71 132.46,42.71 136.32,38.85 162.86,38.85 163.85,39.84 163.85,41.31 159.13,46.03 v159.13,46.35
  Bottom 0.152: U3.8 159.08,46.41 v159.13,46.35
N$67  (via drill 0.35)
  Route2 0.152: U$7.10 121.67,64.05 123.17,65.56 142.6,65.56 147.73,60.43 147.73,55.73 151.61,51.84 157.2,51.84 158.5,50.55 v158.5,49.66
  Bottom 0.152: U3.9 158.42,49.58 v158.5,49.66
N$68  (via drill 0.35)
  Route2 0.152: U$12.7 56.49,33.63 35.99,33.63 33.4,31.04 v33.4,29.97
  Bottom 0.152: U4.27 33.38,29.95 v33.4,29.97
N$69  (via drill 0.35)
  Route2 0.152: U$12.6 58.73,33.33 36.12,33.33 34.04,31.24 v34.04,29.21
  Bottom 0.152: U4.28 v34.04,29.21
N$70  (via drill 0.35)
  Route2 0.152: U$10.5 16.49,12.7 19.88,9.31 35.88,9.31 37.89,11.32 37.89,13.63 34.02,17.5 v34.02,18.39
  Bottom 0.152: U4.5 34.04,18.41 v34.02,18.39
N$71  (via drill 0.35)
  Route2 0.152: U$10.4 14.09,14.09 15.57,14.09 20.05,9.61 35.76,9.61 37.59,11.44 37.59,13.45 33.4,17.64 33.4,19.05 v33.39,19.06
  Bottom 0.152: U4.6 33.38,19.07 v33.39,19.06
N$72  (via drill 0.35)
  Route2 0.152: U$10.2 9.31,14.39 15.7,14.39 20.18,9.92 35.63,9.92 37.28,11.57 37.28,13.32 32.77,17.84 v32.77,18.4 v32.76,18.41
  Bottom 0.152: U4.7 32.72,18.47 32.76,18.42 v32.76,18.41
N$73  (via drill 0.35)
  Route2 0.152: U$10.1 7.08,14.7 15.83,14.7 20.3,10.22 35.5,10.22 36.98,11.7 36.98,13.2 32,18.17 v32,19.05
  Bottom 0.152: U4.8 32.08,19.13 v32,19.05
N$74  (via drill 0.35)
  Route2 0.152: U$10.10 7.08,37.56 15.93,37.56 20.83,32.66 20.83,27.67 23.98,24.52 29.55,24.52 31.39,22.68 v31.39,21.73 v31.39,21.72
  Bottom 0.152: U4.9 31.42,21.69 v31.39,21.71 v31.39,21.72
N$75  (via drill 0.35)
  Route2 0.152: v28.19,19.05 28.19,17.53 U$11.4
  Bottom 0.152: U4.14 28.17,19.07 v28.19,19.05
N$76  (via drill 0.35)
  Route2 0.152: v27.56,18.29 27.56,13.08 U$11.2
  Bottom 0.152: U4.15 27.53,18.31 v27.56,18.29
N$77  (via drill 0.35)
  Route2 0.152: v26.92,19.05 26.92,14.22 U$11.1
  Bottom 0.152: U4.16 26.87,19.1 v26.92,19.05
N$78  (via drill 0.35)
  Route2 0.152: U$8.5 156.21,46.99 v155.83,46.99
  Bottom 0.152: U3.13 v155.83,46.99
N$79  (via drill 0.35)
  Route2 0.152: v26.92,29.97 26.92,34.04 U$11.10
  Bottom 0.152: U4.17 26.87,29.92 v26.92,29.97
N$80  (via drill 0.35)
  Route2 0.152: v27.56,29.21 27.56,35.18 U$11.9
  Bottom 0.152: U4.18 27.53,29.18 v27.56,29.21
N$81  (via drill 0.35)
  Route2 0.152: v28.27,29.92 28.27,30.04 33.02,34.8 U$11.7
  Bottom 0.152: U4.19 28.19,27.94 28.19,29.84 v28.27,29.92
N$82  (via drill 0.35)
  Route2 0.152: v28.96,29.2 28.96,30.22 34.3,35.56 U$11.6
  Bottom 0.152: U4.20 28.83,29.07 v28.96,29.2
N$83  (via drill 0.35)
  Route2 0.152: v99.95,18.39 105.64,12.7 U$14.5
  Bottom 0.152: U5.13 v99.95,18.39
N$84  (via drill 0.35)
  Route2 0.152: U$13.9 75.43,37.33 86.7,37.33 92.91,31.12 92.91,28.58 97.13,24.36 100.56,24.36 101.85,23.06 101.85,22.61 v101.92,22.54
  Bottom 0.152: U5.10 101.91,22.52 v101.92,22.54
N$85  (via drill 0.35)
  Route2 0.152: U$13.7 80.2,37.02 86.57,37.02 92.61,30.99 92.61,28.45 97,24.05 100.41,24.05 101.22,23.24 v101.22,21.72
  Bottom 0.152: U5.11 101.24,21.69 v101.22,21.72
N$86  (via drill 0.35)
  Route2 0.152: U$13.6 82.42,36.7 86.46,36.7 92.3,30.86 92.3,28.32 96.88,23.75 100.2,23.75 100.58,23.37 v100.58,22.48
  Bottom 0.152: U5.12 v100.58,22.48
N$87  (via drill 0.35)
  Route2 0.152: U$15.5 124.97,10.67 116.2,10.67 109.19,17.68 109.19,20.83 107.07,22.96 103.13,22.96 100.58,25.5 v100.58,26.54
  Bottom 0.152: U5.21 v100.58,26.54
N$88  (via drill 0.35)
  Route2 0.152: U$15.4 122.73,10.97 116.33,10.97 109.5,17.8 109.5,20.96 107.19,23.27 103.25,23.27 101.22,25.3 v101.22,25.78
  Bottom 0.152: U5.22 101.24,25.81 v101.22,25.78
N$89  (via drill 0.35)
  Route2 0.152: U$15.2 117.96,11.28 116.46,11.28 109.8,17.93 109.8,21.09 107.32,23.57 103.38,23.57 101.85,25.1 v101.85,26.54
  Bottom 0.152: U5.23 101.91,26.59 v101.85,26.54
N$90  (via drill 0.35)
  Route2 0.152: U$15.1 115.47,12.7 110.11,18.06 110.11,21.21 107.45,23.88 103.5,23.88 102.49,24.89 v102.49,25.78
  Bottom 0.152: U5.24 102.54,25.83 v102.49,25.78
N$91  (via drill 0.35)
  Route2 0.152: U$15.10 115.72,34.44 106.81,34.44 103.25,30.88 v103.25,29.97
  Bottom 0.152: U5.25 103.2,29.92 v103.25,29.97
N$92  (via drill 0.35)
  Route2 0.152: U$15.9 117.96,34.14 106.94,34.14 103.89,31.09 v103.89,29.21
  Bottom 0.152: U5.26 103.83,29.16 v103.89,29.21
N$93  (via drill 0.35)
  Route2 0.152: U$15.7 122.73,33.83 107.06,33.83 104.5,31.27 104.5,30 v104.52,29.97
  Bottom 0.152: U5.27 104.5,29.95 v104.52,29.97
N$94  (via drill 0.35)
  Route2 0.152: U$15.6 124.97,33.53 107.19,33.53 105.16,31.5 v105.16,29.21
  Bottom 0.152: U5.28 v105.16,29.21
N$95  (via drill 0.35)
  Route2 0.152: U$8.4 160.02,42.67 156.46,46.23 v155.19,46.23
  Bottom 0.152: U3.14 155.19,48.26 v155.19,46.23
N$96  (via drill 0.35)
  Route2 0.152: U$8.2 154.56,41.02 v154.56,46.99
  Bottom 0.152: U3.15 154.53,47.02 v154.56,46.99
N$97  (via drill 0.35)
  Route2 0.152: U$8.1 153.92,42.16 v153.92,46.23
  Bottom 0.152: U3.16 153.87,46.28 v153.92,46.23
N$98  (via drill 0.35)
  Route2 0.152: U$8.10 153.92,61.98 v153.92,57.91
  Bottom 0.152: U3.17 153.87,57.86 v153.92,57.91
N$99  (via drill 0.35)
  Route2 0.152: U$8.9 154.56,63.12 v154.56,57.15
  Bottom 0.152: U3.18 154.56,55.88 v154.56,57.15
N$100  (via drill 0.35)
  Route2 0.152: U$8.7 160.02,62.87 155.19,58.04 v155.19,57.91
  Bottom 0.152: U3.19 155.19,55.88 v155.19,57.91
N$101  (via drill 0.35)
  Route2 0.152: U$8.6 161.35,63.5 155.83,57.98 v155.83,57.15
  Bottom 0.152: U3.20 v155.83,57.15
N$102  (via drill 0.35)
  Route2 0.152: v105.18,18.4 105.18,17.39 108.78,13.79 108.78,11.09 107.13,9.43 85.84,9.43 82.57,12.7 U$13.5
  Bottom 0.152: U5.5 105.16,18.46 105.18,18.44 v105.18,18.4
N$103  (via drill 0.35)
  Route2 0.152: U$13.4 80.13,14.09 81.61,14.09 85.96,9.74 107,9.74 108.48,11.21 108.48,13.66 104.52,17.62 104.52,18.98 v104.5,19
  Bottom 0.152: U5.6 v104.5,19
N$104  (via drill 0.35)
  Route2 0.152: U$13.2 75.35,14.39 81.74,14.39 86.09,10.04 106.88,10.04 108.17,11.34 108.17,13.53 103.88,17.83 103.88,18.34 v103.81,18.4
  Bottom 0.152: U5.7 103.83,18.42 v103.81,18.4
N$105  (via drill 0.35)
  Route2 0.152: U$13.1 73.12,14.7 81.87,14.7 86.22,10.35 106.75,10.35 107.87,11.47 107.87,13.41 103.12,18.15 v103.12,19.05
  Bottom 0.152: U5.8 103.2,19.13 v103.12,19.05
N$106  (via drill 0.35)
  Route2 0.152: U$13.10 73.19,37.63 86.83,37.63 93.22,31.24 93.22,28.7 97.26,24.66 100.69,24.66 102.62,22.73 v102.62,21.72
  Bottom 0.152: U5.9 102.54,21.66 102.6,21.72 v102.62,21.72
N$107  (via drill 0.35)
  Route2 0.152: U$14.4 99.31,17.53 v99.31,19.04
  Bottom 0.152: U5.14 99.29,19.07 v99.31,19.04
N$108  (via drill 0.35)
  Route2 0.152: U$14.2 98.68,13.08 v98.68,18.39
  Bottom 0.152: U5.15 98.65,18.42 v98.68,18.39
N$109  (via drill 0.35)
  Route2 0.152: v97.98,18.98 97.98,14.16 U$14.1
  Bottom 0.152: U5.16 97.99,18.99 v97.98,18.98
N$110  (via drill 0.35)
  Route2 0.152: v98.04,29.84 98.04,34.04 U$14.10
  Bottom 0.152: U5.17 97.99,29.79 v98.04,29.84
N$111  (via drill 0.35)
  Route2 0.152: v98.69,29.2 98.69,35.19 U$14.9
  Bottom 0.152: U5.18 98.65,29.17 v98.69,29.2
N$112  (via drill 0.35)
  Route2 0.152: U$14.7 104.14,34.67 v99.32,29.85
  Bottom 0.152: U5.19 99.31,27.94 v99.31,29.84 v99.32,29.85
N$114  (via drill 0.35)
  Route15 0.152: v107.06,19.05 108.33,17.78 166.37,17.78 167.39,18.8 v167.39,26.42
  Bottom 0.152: U5.2 107.09,19.07 v107.06,19.05 | v167.39,26.42 167.39,27.89 U6.30
N$115  (via drill 0.35)
  Route15 0.152: v106.43,26.42 106.43,18.75 105.46,17.79 37.21,17.79 v36.01,18.99
  Bottom 0.152: v106.43,26.42 106.43,27.89 U5.30 | U4.2 35.97,19.03 v36.01,18.99
N$116  (via drill 0.35)
  Route15 0.152: v163.32,46.74 163.58,46.74 164.08,46.23 164.08,45.21 163.32,44.45 83.31,44.45 82.3,43.43 81.03,43.43 80.01,44.45 48.51,44.45 35.05,30.99 v35.05,29.46
  Bottom 0.152: v163.32,46.74 162.97,47.09 U3.2 | v35.05,29.46 35.33,29.18 U4.30
N$117  (via drill 0.35)
  Route15 0.152: v81.66,46.86 83.06,45.47 161.04,45.47 162.31,46.74 v162.31,54.36
  Bottom 0.152: U2.2 81.69,46.89 v81.66,46.86 | U3.30 162.33,54.38 v162.31,54.36
N$118  (via drill 0.35)
  Route15 0.152: v81.03,54.36 81.03,46.86 79.63,45.47 21.22,45.47 20.7,45.99 v20.7,46.88
  Bottom 0.152: v81.03,54.36 81.03,55.83 U2.30 | U1.2 20.73,46.9 v20.7,46.88
N$119  (via drill 0.35)
  Route2 0.152: v100.08,29.21 100.08,29.97 105.66,35.56 U$14.6
  Bottom 0.152: U5.20 99.95,29.08 v100.08,29.21
N$121
  Bottom 0.152: R4.2 38.43,27.91 U4.32
N$122
  Bottom 0.152: R3.2 165.43,55.85 U3.32
N$123
  Bottom 0.152: R2.2 84.25,55.85 U2.32
N$124  (via drill 0.35)
  Route2 0.152: v160.91,18.41 166.62,12.7 U$17.5
  Bottom 0.152: U6.13 v160.91,18.41
N$125
  Bottom 0.152: R5.2 109.55,27.91 U5.32
N$126  (via drill 0.35)
  Route2 0.152: U$17.4 160.27,17.53 v160.27,19.05 v160.27,19.06
  Bottom 0.152: U6.14 160.25,19.07 v160.27,19.06
N$127  (via drill 0.35)
  Route2 0.152: U$16.9 141.39,37.25 147.87,37.25 154.79,30.33 154.79,27.05 158.13,23.7 161.9,23.7 162.81,22.78 v162.81,22.37 v162.82,22.36
  Bottom 0.152: U6.10 162.87,22.3 162.82,22.34 v162.82,22.36
N$128  (via drill 0.35)
  Route2 0.152: U$16.7 146.17,36.95 147.74,36.95 154.48,30.2 154.48,26.92 158.03,23.37 161.54,23.37 162.18,22.73 v162.18,21.72
  Bottom 0.152: U6.11 162.18,20.37 v162.18,21.72
N$129  (via drill 0.35)
  Route2 0.152: U$16.6 148.69,35.56 154.18,30.08 154.18,26.79 157.91,23.06 161.09,23.06 161.54,22.61 v161.54,22.36
  Bottom 0.152: U6.12 v161.54,22.35 v161.54,22.36
N$130  (via drill 0.35)
  Route2 0.152: U$18.5 185.96,10.7 177.11,10.7 174.09,13.72 174.09,17.79 167.74,24.14 163,24.14 161.54,25.6 v161.54,26.54 v161.54,26.55
  Bottom 0.152: U6.21 v161.54,26.56 v161.54,26.55
N$131  (via drill 0.35)
  Route2 0.152: U$18.4 183.73,11.01 177.23,11.01 174.4,13.84 174.4,17.91 167.86,24.45 163.28,24.45 162.18,25.55 v162.18,25.91
  Bottom 0.152: U6.22 162.2,26.81 162.2,26.8 162.2,25.93 v162.18,25.91
N$132  (via drill 0.35)
  Route2 0.152: U$18.2 178.95,11.31 177.36,11.31 174.7,13.97 174.7,18.04 167.99,24.75 163.54,24.75 162.81,25.48 v162.81,26.56
  Bottom 0.152: U6.23 162.87,26.61 v162.81,26.56
N$133  (via drill 0.35)
  Route2 0.152: U$18.1 176.4,12.7 175.01,14.1 175.01,18.16 168.11,25.06 163.92,25.06 163.45,25.53 v163.45,25.91
  Bottom 0.152: U6.24 163.5,25.96 v163.45,25.91
N$134  (via drill 0.35)
  Route2 0.152: v164.21,29.97 164.21,30.76 167.89,34.44 176.68,34.44 U$18.10
  Bottom 0.152: U6.25 164.16,29.92 v164.21,29.97
N$135  (via drill 0.35)
  Route2 0.152: v164.85,29.21 164.85,30.96 168.02,34.13 178.91,34.13 U$18.9
  Bottom 0.152: U6.26 164.79,29.16 v164.85,29.21
N$136  (via drill 0.35)
  Route2 0.152: v165.48,29.97 165.48,31.16 168.14,33.83 183.69,33.83 U$18.7
  Bottom 0.152: U6.27 165.46,29.95 v165.48,29.97
N$137  (via drill 0.35)
  Route2 0.152: v166.12,29.21 166.12,31.37 168.27,33.52 185.92,33.52 U$18.6
  Bottom 0.152: U6.28 v166.12,29.21
N$138  (via drill 0.35)
  Route2 0.152: v166.12,18.39 166.12,17.4 169.54,13.97 169.54,10.9 167.49,8.84 152.47,8.84 148.61,12.7 U$16.5
  Bottom 0.152: U6.5 v166.12,18.39
N$139
  Bottom 0.152: R6.2 170.61,27.91 U6.32
N$140  (via drill 0.35)
  Route2 0.152: U$17.2 159.64,13.08 v159.64,18.4 v159.63,18.41
  Bottom 0.152: U6.15 159.61,18.44 159.63,18.42 v159.63,18.41
N$141  (via drill 0.35)
  Route2 0.152: U$16.4 146.17,14.09 147.66,14.09 152.6,9.14 167.36,9.14 169.24,11.03 169.24,13.84 165.5,17.58 165.5,18.64 v165.5,19.07
  Bottom 0.152: U6.6 165.46,19.11 v165.5,19.07
N$142  (via drill 0.35)
  Route2 0.152: U$16.2 141.39,14.39 147.78,14.39 152.72,9.45 167.23,9.45 168.94,11.15 168.94,13.69 164.89,17.73 v164.89,18.39
  Bottom 0.152: U6.7 164.85,20.3 164.85,18.43 v164.89,18.39
N$143  (via drill 0.35)
  Route2 0.152: U$16.1 139.16,14.7 147.91,14.7 152.85,9.75 167.11,9.75 168.63,11.28 168.63,13.56 164.21,17.98 v164.21,19.05
  Bottom 0.152: U6.8 164.16,19.1 v164.21,19.05
N$144  (via drill 0.35)
  Route2 0.152: U$16.10 139.16,37.56 147.99,37.56 155.09,30.45 155.09,27.17 158.26,24 162.18,24 163.58,22.61 v163.58,21.72
  Bottom 0.152: U6.9 163.5,21.64 v163.58,21.72
N$145  (via drill 0.35)
  Route2 0.152: v158.88,19.05 158.88,14.1 U$17.1
  Bottom 0.152: U6.16 158.95,19.13 v158.88,19.05
N$146  (via drill 0.35)
  Route2 0.152: U$17.10 159,34.04 v159,30.05
  Bottom 0.152: U6.17 158.95,30 v159,30.05
N$147  (via drill 0.35)
  Route2 0.152: v159.64,29.34 159.64,35.18 U$17.9
  Bottom 0.152: U6.18 159.61,29.31 v159.64,29.34
N$148  (via drill 0.35)
  Route2 0.152: U$17.7 165.1,34.8 160.4,30.1 160.32,30.1 v160.27,30.05
  Bottom 0.152: U6.19 160.25,30.03 v160.27,30.05
N$149  (via drill 0.35)
  Route2 0.152: v160.91,29.34 160.91,30.1 166.37,35.56 U$17.6
  Bottom 0.152: U6.20 v160.91,29.34
N$155  (via drill 0.35)
  Route2 0.152: U$19.CAT 75.95,31.24 67.88,31.24 61.06,38.06 25.04,38.06 18.16,44.94 v18.16,46.86
  Bottom 0.152: U1.6 18.14,46.89 v18.16,46.86
N$157  (via drill 0.35)
  Route2 0.152: U$21.CAT 45.97,28.7 50.29,33.02 61.04,33.02 61.77,33.75 61.77,36.47 60.79,37.45 24.79,37.45 16.76,45.48 v16.76,46.86
  Bottom 0.152: U1.8 16.84,46.94 v16.76,46.86
N$158  (via drill 0.35)
  Route2 0.152: U$1.CAT 78.92,28.7 76.07,31.55 68,31.55 61.18,38.37 25.16,38.37 18.8,44.74 v18.8,46.1
  Bottom 0.152: U1.5 v18.8,46.1
N$159  (via drill 0.35)
  Route2 0.152: U$20.CAT 44.45,26.67 50.42,32.64 61.09,32.64 62.1,33.66 62.1,36.57 60.91,37.76 24.91,37.76 17.4,45.27 v17.4,46.1
  Bottom 0.152: U1.7 17.48,46.18 v17.4,46.1
R2  (via drill 0.35)
  Route2 0.152: J1.3 13.77,70.16 11.66,70.16 8.28,66.78 8.28,57.66 14.87,51.07 v14.87,49.65
  Bottom 0.152: U1.11 14.88,49.63 v14.87,49.65
SIN  (via drill 0.35)
  Route2 0.152: JP1.5 173.99,3.42 175.82,5.25 175.82,10.87 168.15,18.54 v168.15,18.8
  Bottom 0.152: v168.15,18.8 168.05,18.9 U6.2

## Text on the board
SilkscreenTop: G2 | R2 | B1 | G1 | G | 5V | 3V
SilkscreenBottom: G2 | R2 | B1 | G1 | G | 5V | 3V | GPS Clock v3 / Andrew Magill / github.com/AMagill/GPSClock / / Configure via Bluetooth: / amagill.github.io/GPSClock/